# Altium PCB PCB1.PcbDoc
Units mil, origin at the board's own origin, x right, y up, seen from the top; angles counter-clockwise.
Board outline 1400 x 1300 mil, 4 copper layers (L1 (Signal), L2 (GND), L3 (GND), L4 (Signal)), stack 60.468 mil thick; 35 components, 27 nets, 172 pads, 68 vias.
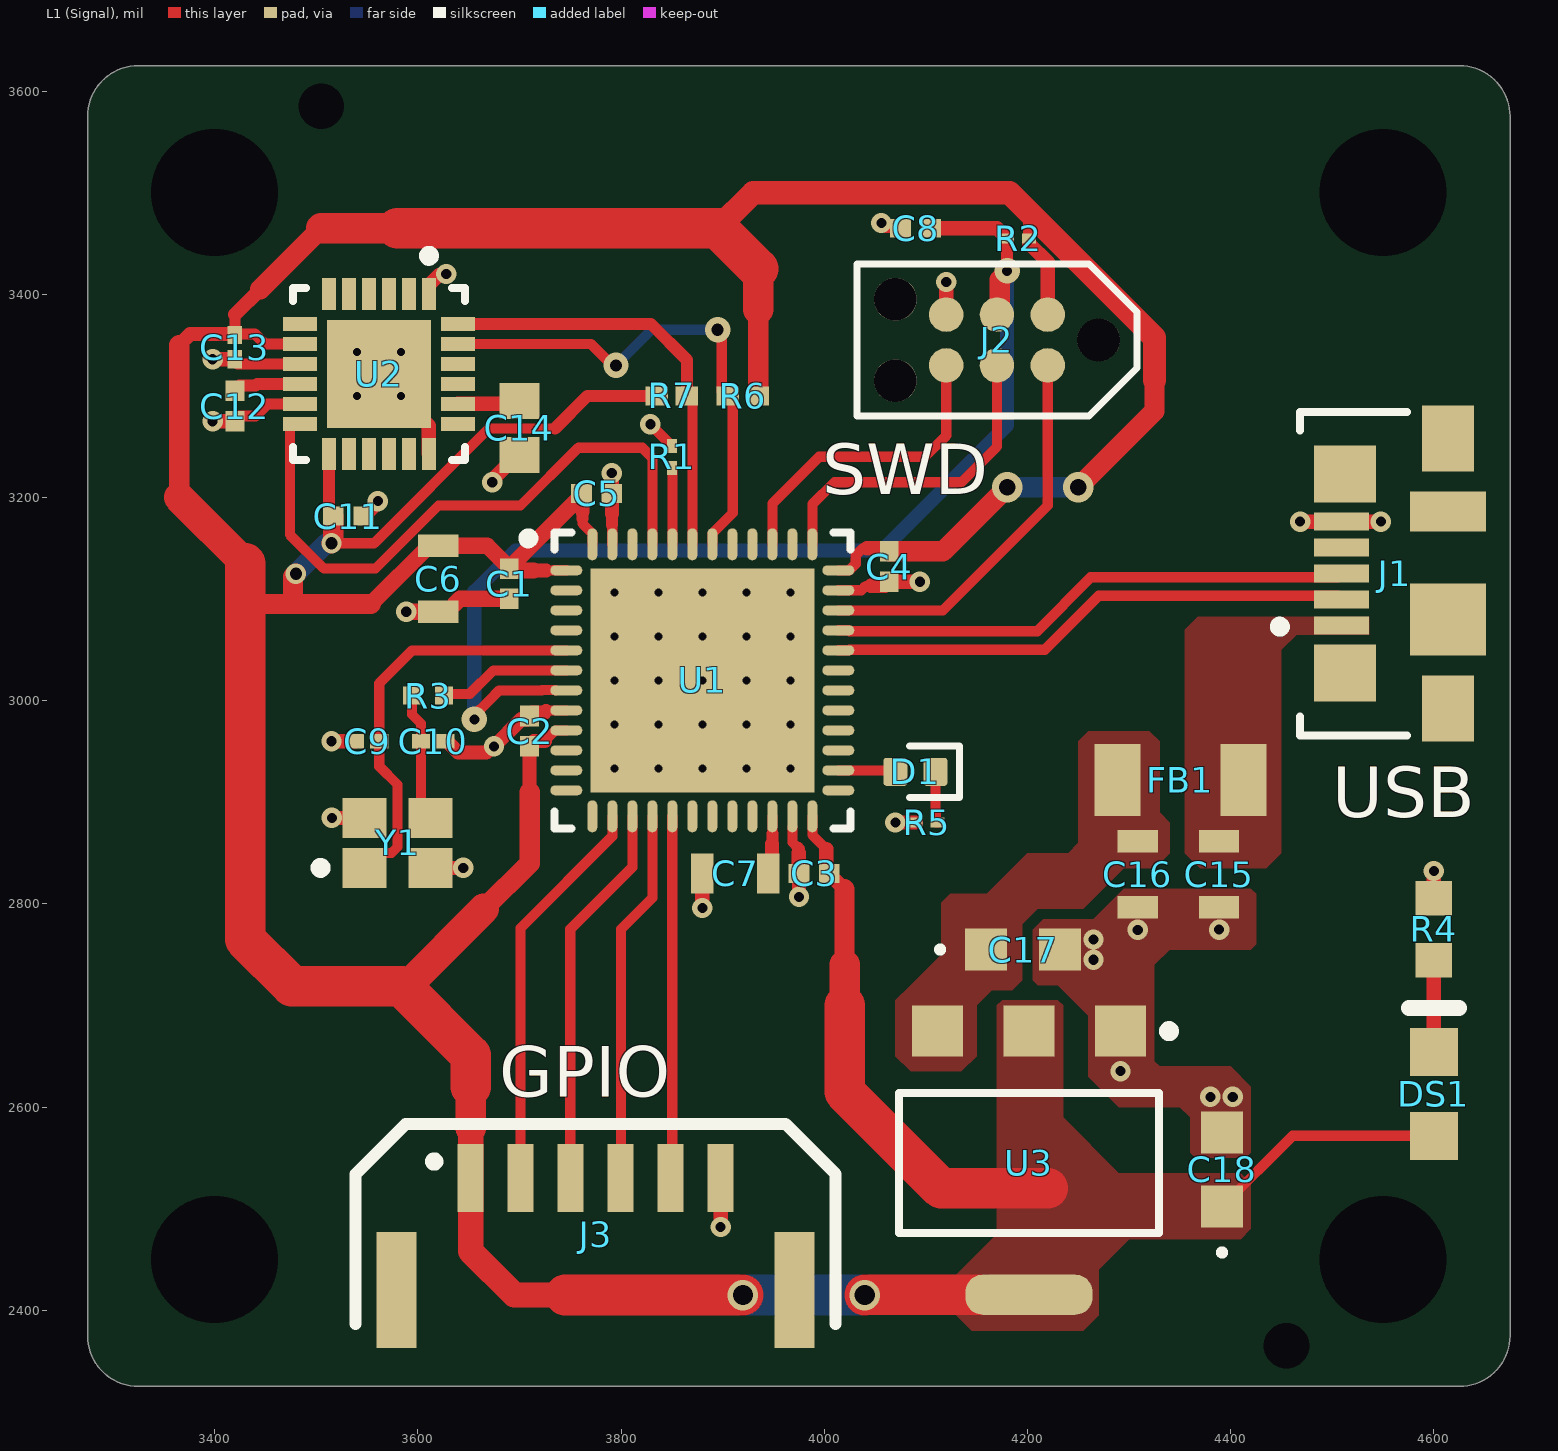
[diagram p0: L1 (Signal) view]
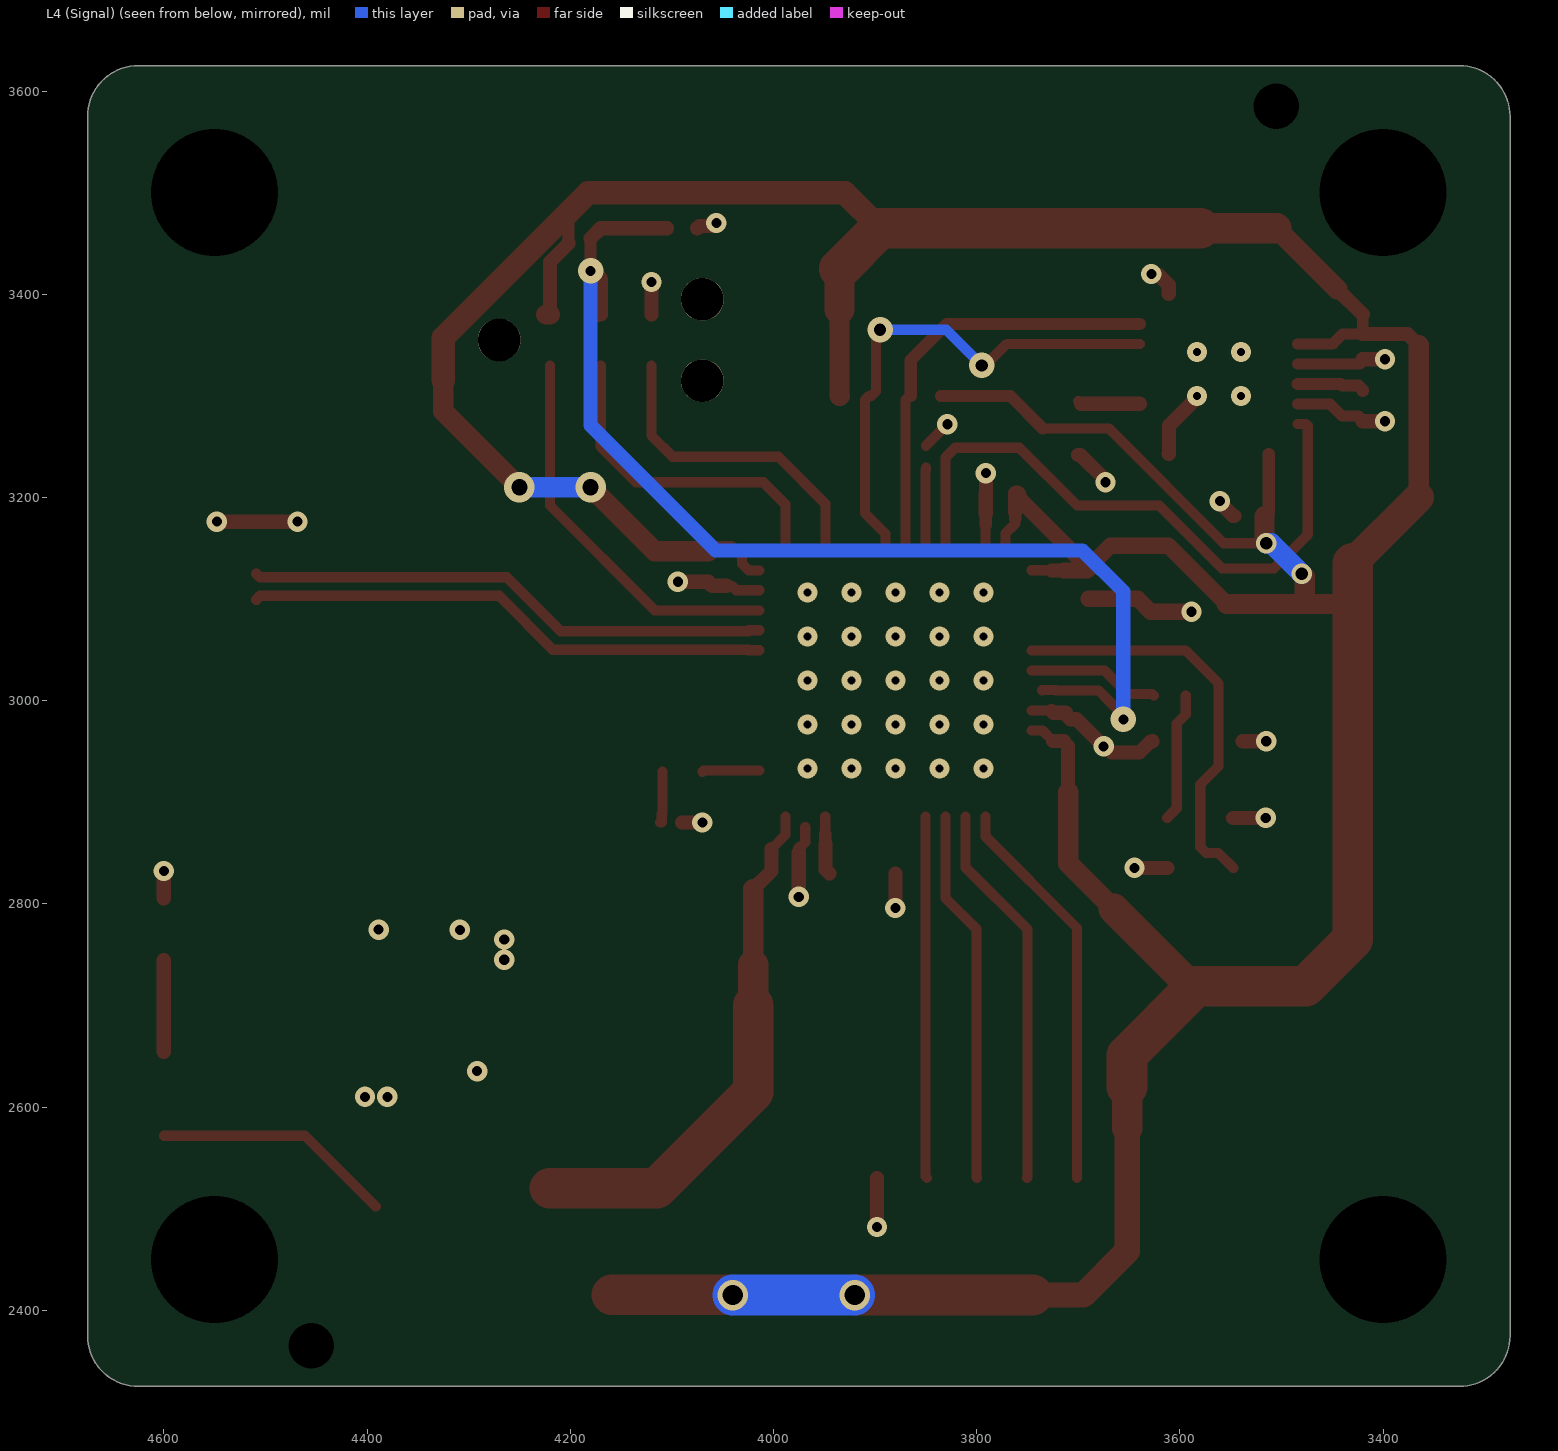
[diagram p1: L4 (Signal) view, seen from below]
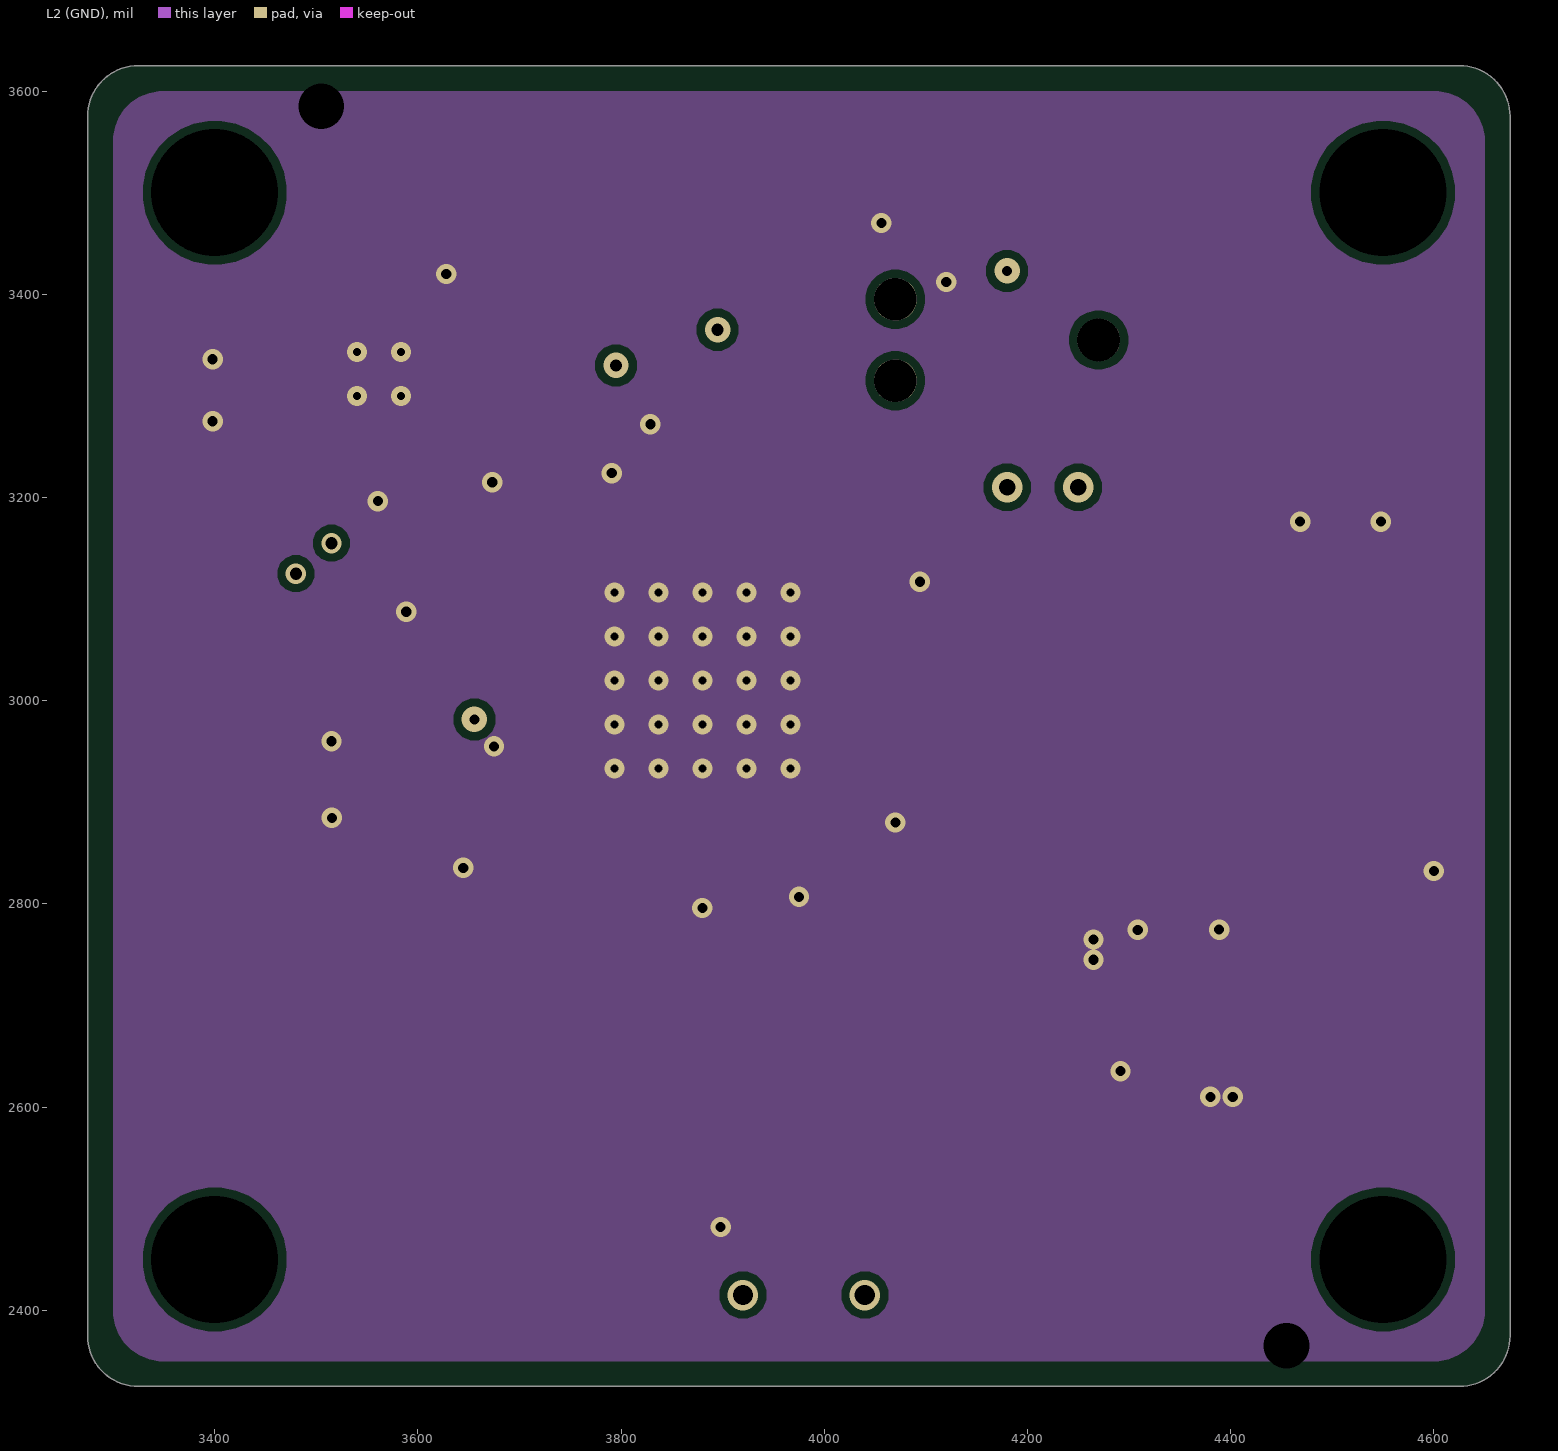
[diagram p2: L2 (GND)]
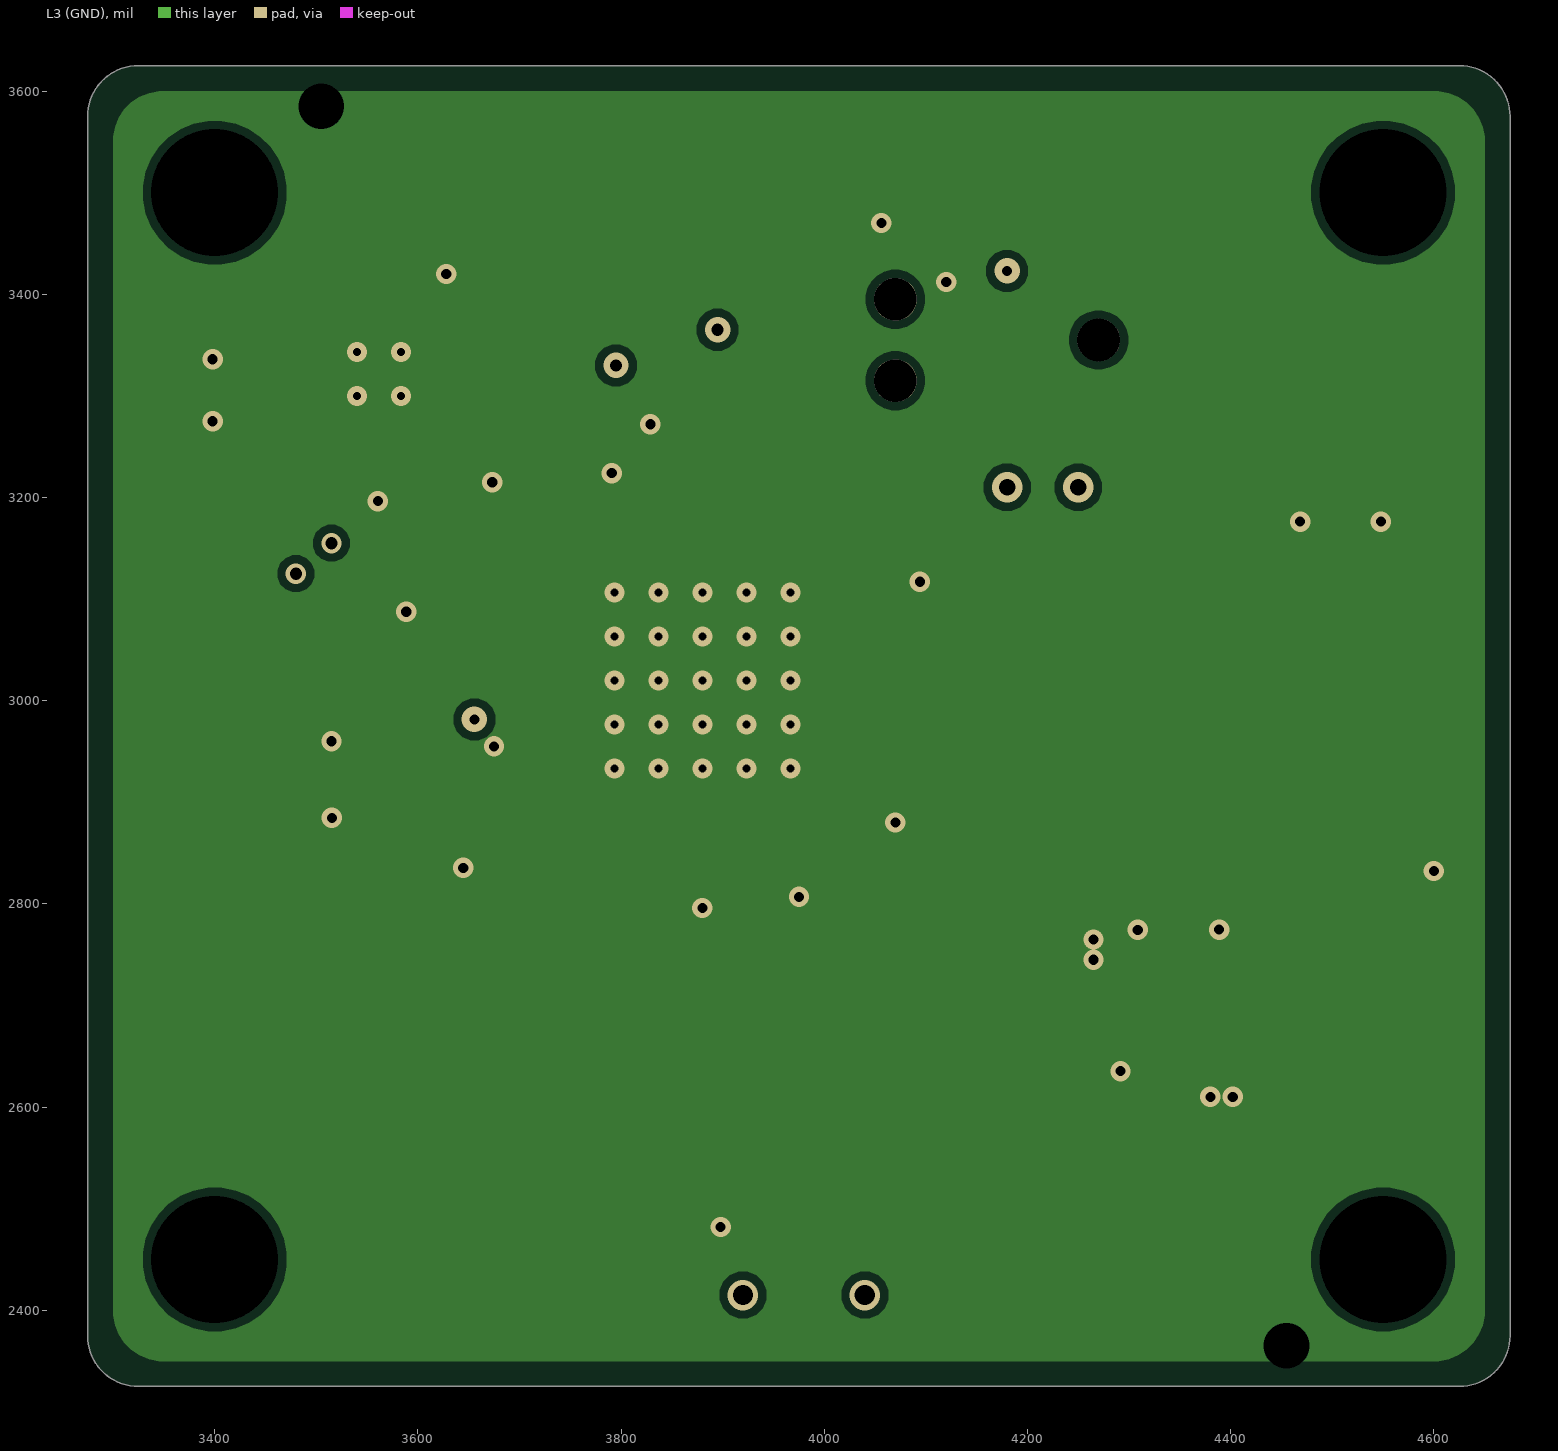
[diagram p3: L3 (GND)]
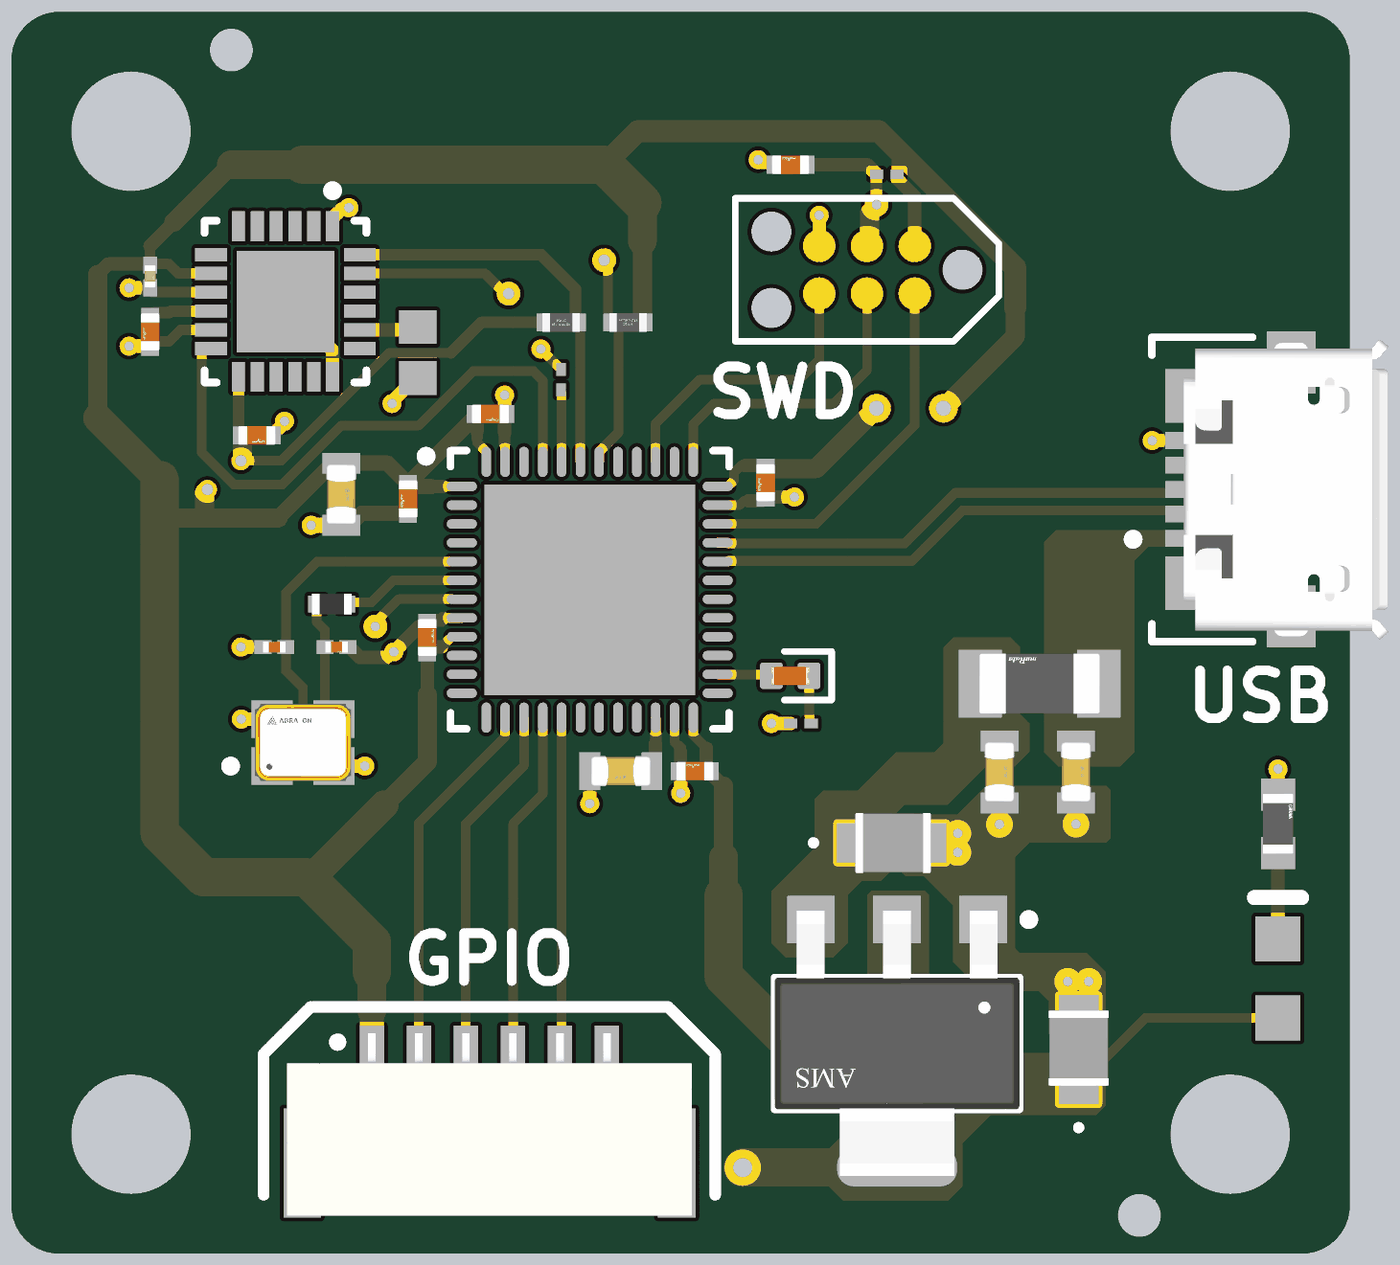
[diagram p4: 3D render of the assembled board from above, using the file's embedded part models]

## Layer stack, top to bottom
Top Solder: solder mask 1, SM-001, Dk 4
L1 (Signal): signal copper 1.378
Dielectric 1: prepreg 7.874, PP-017, Dk 4.4
L2 (GND): signal copper 0.0175
Dielectric 3: core 41.9291, Core-039, Dk 4.6
L3 (GND): signal copper 0.0175
Dielectric 5: prepreg 7.874, PP-017, Dk 4.4
L4 (Signal): signal copper 1.378
Bottom Solder: solder mask 1, SM-001, Dk 4

## Board outline
3275,2375 ccw(c3325,2375) 3325,2325 4625,2325 ccw(c4625,2375) 4675,2375 4675,3575 ccw(c4625,3575) 4625,3625 3325,3625 ccw(c3325,3575) 3275,3575

## Design rules (kind name [scope] priority, off if disabled: settings)
Clearance [All] p1: gap=8 ignorepadtopadclearanceinfootprint=FALSE except(0: SMDPad-Hole THPad-Hole Via-Hole; 1: Arc-SMDPad Track-SMDPad SMDPad-SMDPad; 2: Arc-Hole Track-Hole)
DiffPairsRouting [All] p1: maxlimit=10 minlimit=8 mostfreqgap=10 toplayer_maxgap=8 toplayer_prefgap=8 toplayer_minwidth=10.24 toplayer_maxwidth=10.24 toplayer_prefwidth=10.24 bottomlayer_maxgap=8 bottomlayer_prefgap=8 bottomlayer_minwidth=10.24 bottomlayer_maxwidth=10.24 bottomlayer_prefwidth=10.24 impedanceprofiledriven=TRUE impedanceprofileid={64983045-385C-4835-AEB7-88178D9B45DB} impedanceprofilevalue=90.000000 maxuncoupledlength=500
HoleSize [All] p1: absolutevalues=TRUE maxlimit=200 minlimit=1 maxpercent=80.000 minpercent=20.000
MinimumSolderMaskSliver [All] p1: minsoldermaskwidth=0.01
PolygonConnect [All] p1: connectstyle=Direct reliefconductorwidth=10 reliefentries=4 polygonreliefangle="90 Angle" airgapwidth=10
RoutingVias [All] p1: holewidth=12 width=25 viastyle="Through Hole" minholewidth=5 minwidth=10 maxholewidth=200 maxwidth=200
SilkToSolderMaskClearance [IsPad] p1: minsilkscreentomaskgap=0.01 clearancetoexposedcopper=TRUE
SolderMaskExpansion [All] p1: expansion=4 istentingtop=FALSE
SupplyNets "Schematic Supply Nets_3" [InNet('+3V3')] p1: voltage=0.000
SupplyNets "Schematic Supply Nets_2" [InNet('GND')] p2: voltage=0.000
SupplyNets "Schematic Supply Nets_1" [InNet('VBUS')] p3: voltage=0.000
SupplyNets "Schematic Supply Nets" [InNet('+5V')] p4: voltage=0.000
UnRoutedNet [All] p1: checkbadconnections=TRUE
Width [All] p1: maxlimit=60 minlimit=4 preferedwidth=10
25 further rules are at their usual default settings.

## Classes and differential pairs
differential pair USB_D: +USB_D_P -USB_D_N

## Components (designator, comment, footprint, x,y, rotation, side; value= is the part's Value field where it differs from the comment)
C1 "GCM155R71C104KA55D" FP-GCM155-0_05-IPC_C 3690,3115.1 r270 top
C2 "GCM155R71C104KA55D" FP-GCM155-0_05-IPC_C 3710,2970 r90 top
C3 "GCM155R71C104KA55D" FP-GCM155-0_05-IPC_C 3990,2830 r180 top
C4 "GCM155R71C104KA55D" FP-GCM155-0_05-IPC_C 4064,3132 r270 top
C5 "GCM155R71C104KA55D" FP-GCM155-0_05-IPC_C 3776,3204 r0 top
C6 "CGA3E1X7S1C225K080AE" FP-CGA3E-0_3-0_1-IPC_C 3620,3120 r270 top
C7 "CGA3E1X7S1C225K080AE" FP-CGA3E-0_3-0_1-IPC_C 3912.48,2830 r180 top
C8 "GCM155R71C104KA55D" FP-GCM155-0_05-IPC_C 4090,3465 r180 top
C9 "GJM0335C1E100GB01D" FP-GJM033-0_03-IPC_B 3550,2960 r180 top
C10 "GJM0335C1E100GB01D" FP-GJM033-0_03-IPC_B 3615,2960 r0 top
C11 "GCM155R71C104KA55D" FP-GCM155-0_05-IPC_C 3531.65,3181.65 r0 top
C12 "GCM155R71C104KA55D" FP-GCM155-0_05-IPC_C 3420,3290 r270 top
C13 "C0603X7R0J103K030BA" FP-C0603-030-0_03-IPC_B 3420,3348.06 r270 top
C14 "C0603X222K5RACTU" CAPC1608X87X35NL15T15 3700,3268.43 r270 top value=2n2
C15 "CGA3E1X7S1C225K080AE" FP-CGA3E-0_3-0_1-IPC_C 4388.62,2829.22 r270 top
C16 "CGA3E1X7S1C225K080AE" FP-CGA3E-0_3-0_1-IPC_C 4308.62,2829.22 r270 top
C17 "C2012X5R1C226M085AC" C2012_Commercial 4195.75,2755 r0 top
C18 "C2012X5R1C226M085AC" C2012_Commercial 4391.5,2538.58 r90 top
D1 "RED" LED_0402_RED 4089.68,2930 r0 top
DS1 "HSMG-C170" AVAG-HSMX-C170_V 4600,2613.08 r90 top
FB1 "BLM31PG121SN1L" FP-BLM31-0_2-t1_1-MFG 4350.63,2921.7 r180 top
J1 "473460001" FP-473460001-MFG 4600,3125 r90 top
J2 "TC2030-NL" TC2030-NL-FP 4170,3355 r180 top
J3 "SM06B-GHS-TB" SM06B-GHS-TB 3775,2475 r0 top
R1 "CRG0201F10K" RESC0603X26X15LL03T05 3850,3240 r270 top
R2 "CRG0201F10K" RESC0603X26X15LL03T05 4190.83,3455 r0 top
R3 "ERJ2GE0R00X" RESC1005X40X25LL05T05 3610,3005 r0 top
R4 "AC0603FR-071KL" FP-AC0603-IPC_B 4600,2775 r90 top
R5 "CRG0201F10K" RESC0603X26X15LL03T05 4100.83,2880 r0 top
R6 "CRGCQ0402J2K2" FP-CRGCQ0402-IPC_C 3920,3300 r180 top value=2k2
R7 "CRGCQ0402J2K2" FP-CRGCQ0402-IPC_C 3850,3300 r0 top value=2k2
U1 "STM32F411CEU6" STM-UFQFPN48_L 3880,3020 r0 top
U2 "MPU-6050" IS-QFN-24_V 3561.65,3321.65 r270 top
U3 "AMS1117-3.3" FP-AMS1117-IPC_C 4201.5,2545 r270 top
Y1 "ABM10AIG-24.000MHZ-2Z-T" FP-ABM10AIG-MFG 3580,2860 r0 top

## Footprints (in the part's own frame and the unit in brackets; to place one, negate y for a bottom-side part, rotate by r counter-clockwise, add the part's x,y. Pads: shape width x height; smd on the part's side, far side on the other; paste and mask are expansions set on the pad)
AVAG-HSMX-C170_V [mm] "SMD, 2-Leads, Body 2x1.25mm, Height 0.8mm"
  rect 1.2x1.2 smd: 1(-1.05,0) 2(1.05,0)
  silkscreen extent 2.15,-0.63 2.15,0.63, body extent -1,-0.63 1,0.63, height 0.8
C2012_Commercial [mm]
  rect 1.05x1.05 smd: 1(-0.925,0) 2(0.925,0)
  silkscreen extent -2.12,-0.05 -2.02,0.05, body extent -0.96,-0.8 1.04,0.8, height 1.25
CAPC1608X87X35NL15T15 [mm] "Chip Capacitor, 2-Leads, Body 1.60x0.80mm, IPC Medium Density"
  rect 0.9x1 smd: 1(-0.675,0) 2(0.675,0)
  body extent -0.87,-0.48 0.87,0.47, height 0.87
FP-473460001-MFG [mm]
  rect 0.45x1.38 smd paste+0 mask+0: 1(-1.3,2.31) 2(-0.65,2.31) 3(0,2.31) 4(0.65,2.31) 5(1.3,2.31)
  rect 1.425x1.55 smd paste+0 mask+0: 6(-2.488,2.225) 7(2.488,2.225)
  rect 1.65x1.3 smd paste+0 mask+0: 8(-3.375,-0.35) 11(3.375,-0.35)
  rect 1.8x1.9 smd paste+0 mask+0: 9(-1.15,-0.35)
  rect 1x1.9 smd paste+0 mask+0: 10(1.55,-0.35)
  silkscreen extent -4.05,0.67 4.05,3.97, body extent -4.3,-2.48 4.3,3.45, height 0.25
FP-ABM10AIG-MFG [mm]
  rect 1.1x1 smd paste+0 mask+0: 1(-0.825,-0.625) 2(0.825,-0.625) 3(0.825,0.625) 4(-0.825,0.625)
  silkscreen extent -2.05,-0.75 -1.8,-0.5, body extent -1.48,-1.22 1.48,1.22, height 0.25
FP-AC0603-IPC_B [mil]
  rect 33.81x35.91 smd paste+0 mask+0: 1(-30.58,0) 2(30.58,0)
  body extent -57,-28 57,28, height 10
FP-AMS1117-IPC_C [mm]
  rect 1.27x1.27 smd paste+0 mask+0: 1(-3.295,2.29) 2(-3.295,0) 3(-3.295,-2.29)
  rrect87% 1.004x3.182 smd paste+0 mask+0: 4(3.295,0)
  silkscreen extent -3.42,-3.25 1.75,3.63, body extent -3.9,-3.35 3.9,3.35, height 0.25
FP-BLM31-0_2-t1_1-MFG [mm]
  rect 1.15x1.8 smd paste+0 mask+0: 1(-1.575,0) 2(1.575,0)
  body extent -2.25,-1 2.25,1, height 0.25
FP-C0603-030-0_03-IPC_B [mil]
  rect 17.97x14.28 smd paste+0 mask+0: 1(-11.94,0) 2(11.94,0)
  body extent -27,-13 27,13, height 10
FP-CGA3E-0_3-0_1-IPC_C [mm]
  rect 0.556x1.006 smd paste+0 mask+0: 1(-0.825,0) 2(0.825,0)
  body extent -1.2,-0.65 1.2,0.65, height 0.25
FP-CRGCQ0402-IPC_C [mil]
  rect 22.03x18.6 smd paste+0 mask+0: 1(-14.81,0) 2(14.81,0)
  body extent -30,-15 30,15, height 10
FP-GCM155-0_05-IPC_C [mil]
  rect 20.29x18.6 smd paste+0 mask+0: 1(-14.9,0) 2(14.9,0)
  body extent -29,-15 29,15, height 10
FP-GJM033-0_03-IPC_B [mil]
  rect 17.88x14.28 smd paste+0 mask+0: 1(-11.98,0) 2(11.98,0)
  body extent -27,-13 27,13, height 10
IS-QFN-24_V [mm] "QFN, 24-Leads, Body 4x4mm, Pitch 0.5mm, Thermal Pad 2.7x2.6mm"
  rect 0.8x0.35 smd: 1(-2,1.25) 2(-2,0.75) 3(-2,0.25) 4(-2,-0.25) 5(-2,-0.75) 6(-2,-1.25) 13(2,-1.25) 14(2,-0.75) 15(2,-0.25) 16(2,0.25) 17(2,0.75) 18(2,1.25)
  rect 0.35x0.85 smd mask+0.102: 7(-1.25,-1.975) 8(-0.75,-1.975) 9(-0.25,-1.975) 10(0.25,-1.975) 11(0.75,-1.975) 12(1.25,-1.975) 19(1.25,1.975) 20(0.75,1.975) 21(0.25,1.975) 22(-0.25,1.975) 23(-0.75,1.975) 24(-1.25,1.975)
  rect 2.7x2.6 smd: 25(0,0)
  silkscreen extent -3.07,-2.15 2.15,2.15, body extent -2,-2 2,2, height 0.95
LED_0402_RED [mm]
  rrect25% 0.6x0.7 smd: A(-0.5,0) K(0.5,0)
  silkscreen extent -0.15,-0.65 1.1,0.65, body extent -0.51,-0.25 0.51,0.25, height 0.45
RESC0603X26X15LL03T05 [mm] "Chip Resistor, 2-Leads, Body 0.60x0.30mm, IPC High Density"
  rect 0.35x0.25 smd: 1(-0.275,0) 2(0.275,0)
  body extent -0.32,-0.16 0.31,0.17, height 0.26
RESC1005X40X25LL05T05 [mm] "Chip Resistor, 2-Leads, Body 1.05x0.55mm, IPC High Density"
  rect 0.45x0.45 smd: 1(-0.4,0) 2(0.4,0)
  body extent -0.53,-0.28 0.53,0.28, height 0.4
SM06B-GHS-TB [mm]
  rect 0.65x1.7 smd: 1(-3.125,1.4) 2(-1.875,1.4) 3(-0.625,1.4) 4(0.625,1.4) 5(1.875,1.4) 6(3.125,1.4)
  rect 1x2.9 smd: ""(-4.975,-1.4) ""(4.975,-1.4)
  silkscreen extent -6,-2.25 6,2.75, body extent -5.38,-2.8 5.38,2.05, height 4.26
STM-UFQFPN48_L [mm] "QFN, 48-Leads, Body 7.1x7.1mm, Pitch 0.5mm, Thermal Pad 5.6x5.6mm, IPC High Density"
  oval 0.8x0.25 smd: 1(-3.4,2.75) 2(-3.4,2.25) 3(-3.4,1.75) 4(-3.4,1.25) 5(-3.4,0.75) 6(-3.4,0.25) 7(-3.4,-0.25) 8(-3.4,-0.75) 9(-3.4,-1.25) 10(-3.4,-1.75) 11(-3.4,-2.25) 12(-3.4,-2.75) 25(3.4,-2.75) 26(3.4,-2.25) 27(3.4,-1.75) 28(3.4,-1.25) 29(3.4,-0.75) 30(3.4,-0.25) 31(3.4,0.25) 32(3.4,0.75) 33(3.4,1.25) 34(3.4,1.75) 35(3.4,2.25) 36(3.4,2.75)
  oval 0.25x0.8 smd: 13(-2.75,-3.4) 14(-2.25,-3.4) 15(-1.75,-3.4) 16(-1.25,-3.4) 17(-0.75,-3.4) 18(-0.25,-3.4) 19(0.25,-3.4) 20(0.75,-3.4) 21(1.25,-3.4) 22(1.75,-3.4) 23(2.25,-3.4) 24(2.75,-3.4) 37(2.75,3.4) 38(2.25,3.4) 39(1.75,3.4) 40(1.25,3.4) 41(0.75,3.4) 42(0.25,3.4) 43(-0.25,3.4) 44(-0.75,3.4) 45(-1.25,3.4) 46(-1.75,3.4) 47(-2.25,3.4) 48(-2.75,3.4)
  rect 5.6x5.6 smd: 49(0,0)
  silkscreen extent -4.47,-3.7 3.7,3.7, body extent -3.55,-3.55 3.55,3.55, height 0.6
TC2030-NL-FP [mil]
  round 33.98 smd paste-16.99: 1(-50,-25) 2(-50,25) 3(0,-25) 4(0,25) 5(50,-25) 6(50,25)
  round 42.01 hole 42.01 unplated: MH(-100,0) MH(100,-40) MH(100,40)
  silkscreen extent -138,-75 138,75

## Part data
C1 C2 C3 C4: library part CMP-2008-03711-3, "Ceramic Capacitor for Automotive 100nF ±10% 16VDC X7R 0402 Paper T/R", Capacitance=100nF, Case Code (Imperial)=0402, Case Code (Metric)=1005, Dielectric=X7R, Max Operating Temperature=125°C, Min Operating Temperature=-55°C, Package Quantity=1, Ratings=AEC-Q200, Tolerance=10%, Voltage=16V, Case/Package=0402, Depth=0.5mm, Height=0.5mm, Lead Free="Lead Free", Length=1mm, Mount="Surface Mount", Packaging="Tape and Reel", Radiation Hardening=No, REACH SVHC="No SVHC", Termination=SMD/SMT, Thickness=0.022inch, Voltage Rating=16V, Voltage Rating (DC)=16V, Width=0.02inch
C5 C8 C11 C12: library part CMP-2008-03711-3, "Ceramic Capacitor for Automotive 100nF ±10% 16VDC X7R 0402 Paper T/R", Capacitance=100n, Case Code (Imperial)=0402, Case Code (Metric)=1005, Dielectric=X7R, Max Operating Temperature=125°C, Min Operating Temperature=-55°C, Package Quantity=1, Ratings=AEC-Q200, Tolerance=10%, Voltage=16V, Case/Package=0402, Depth=0.5mm, Height=0.5mm, Lead Free="Lead Free", Length=1mm, Mount="Surface Mount", Packaging="Tape and Reel", Radiation Hardening=No, REACH SVHC="No SVHC", Termination=SMD/SMT, Thickness=0.022inch, Voltage Rating=16V, Voltage Rating (DC)=16V, Width=0.02inch
C6 C7: library part CMP-08246-001138-1, "Cap Ceramic 2.2uF 16V X7S 10% Pad SMD 0603 +125°C Automotive T/R", Capacitance=2u2, Case Code (Imperial)=0603, Case Code (Metric)=1608, Max Operating Temperature=125°C, Min Operating Temperature=-55°C, Ratings=AEC-Q200, Tolerance=10%, Voltage Rating=16V, Case/Package=0603, Features="Soft Termination", Length=0.063inch, Mount="Surface Mount", Packaging="Tape and Reel", Thickness=0.037inch, Width=0.031inch
C9 C10: library part CMP-06035-012709-1, "Ceramic Capacitor 10pF ±2% 25V C0G 0201 (0603 Metric)", Capacitance=10p, Case Code (Imperial)=0201, Case Code (Metric)=0603, Dielectric=C0G, Max Operating Temperature=125°C, Min Operating Temperature=-55°C, Package Quantity=15000, Resistor Type=Ceramic, Tolerance=2%, Voltage Rating (DC)=25V, Case/Package=0201, Height=0.3mm, Length=0.6mm, Mount="Surface Mount", Packaging="Tape and Reel", Termination=SMD/SMT, Thickness=300um, Weight=1.2E-05oz, Width=0.3mm
C13: library part CMP-08246-006272-1, "Multilayer Ceramic Capacitors 10nF ±10% 6.3V X7R SMD 0201", Capacitance=10n, Case Code (Imperial)=0201, Case Code (Metric)=0603, Dielectric=X7R, Dielectric Material=Ceramic, Max Operating Temperature=125°C, Min Operating Temperature=-55°C, Package Quantity=1, Tolerance=10%, Voltage Rating=6.3V, Case/Package=0201, Construction=Flat, Depth=0.3mm, Height=0.3mm, Lead Free="Lead Free", Length=0.6mm, Mount="Surface Mount", Number of Pins=2, Packaging="Tape and Reel", Radiation Hardening=No, Resistor Type=Ceramic, RoHS Compliant=Yes, Series=C, Termination=Wraparound, Thickness=0.013inch, Voltage Rating (DC)=6.3V, Weight=6E-06oz, Width=0.012inch
C14: library part CMP-2006-03302-1, Manufacturer=Kemet, Part Number=C0603X222K5RACTU
C15 C16: library part CMP-08246-001138-1, "Cap Ceramic 2.2uF 16V X7S 10% Pad SMD 0603 +125°C Automotive T/R", Capacitance=2u2F, Case Code (Imperial)=0603, Case Code (Metric)=1608, Max Operating Temperature=125°C, Min Operating Temperature=-55°C, Ratings=AEC-Q200, Tolerance=10%, Voltage Rating=16V, Case/Package=0603, Features="Soft Termination", Length=0.063inch, Mount="Surface Mount", Packaging="Tape and Reel", Thickness=0.037inch, Width=0.031inch
C17 C18: "Capacitor", Capacitance=22uF, Manufacturer_Name=TDK, Mouser Part Number=810-C2012X5R1C226MAC, Arrow Part Number=C2012X5R1C226M085AC, Arrow Price/Stock=https://www.arrow.com/en/products/c2012x5r1c226m085ac/tdk, Datasheet Link=https://product.tdk.com/system/files/dam/doc/product/capacitor/ceramic/mlcc/catalog/mlcc_commercial_general_en.pdf, Height=0.75mm, Manufacturer_Part_Number=C2012X5R1C226M085AC, Mouser Price/Stock=https://www.mouser.co.uk/ProductDetail/TDK/C2012X5R1C226M085AC?qs=6JAMGB%252BEdkx95FUmvIwfyQ%3D%3D
D1: library part LED_0402_RED, "LED 0402 RED SMD"
DS1: library part CMP-2000-05062-1, "Chip LED, Green, 2.2 V, -40 to 85 degC, 2-Pin SMD, Pb-Free, Tape and Reel", Forward Current If=20mA, Forward Voltage=2.2V, Forward Voltage VF Max=2.6V, LED Colour=Green, Manufacturer=Avago, Operating Temperature Max=85degC, Operating Temperature Min=-30degC, Operating Temperature Range=-30degCto+85degC, Opto Case Style=SMD, Package Description="2-Pin Surface Mount Device, Body 2 x 1.25 mm, Height 0.8 mm", Package Reference=HSMX-C170, Storage Temperature Min=-40degC, Bulb Size=1.25mmx1.4mm, Datasheet URL=https://datasheet.ciiva.com/29280/180495-da-01-en-chip-led-hsmg-c170-gelb-gruen-29280971.pdf, Datasheet Version=Oct-08, Dominant Wavelength=572nm, Dominant Wavelength Typ=572nm, External Depth=0.8mm, External Length / Height=2mm, External Width=1.25mm, Forward Current If Max=20mA, LED Mounting=SMD, LED Type=Standard, Lens Shape=Rectangular, Light Area Height=1mm, Luminous Intensity=15mcd, Luminous Intensity Min=4mcd, Luminous Intensity Typ=15mcd, Manufacturer URL=http://www.avagotech.com/, Mounting Type=SMD, MSL=MSL2A-4weeks, No. of Pins=2, Opto Mounting Orientation=Top, Packaging=CutTape, Peak Forward Current=20mA, Peak Wavelength=570nm, PIV Max=5V, Storage Temperature Max=85degC, SVHC=NoSVHC(16-Jun-2014), Viewing Angle=170deg, Voltage Vf Typ=2.2V, Wavelength Typ=570nm
FB1: library part CMP-0686-00732-3, "Chip Ferrite Bead Array, 1206, 120Ω @ 100MHz, 0.02Ω, 25%, 3.5A", Case Code (Imperial)=1206, Case Code (Metric)=3216, Current Rating=3.5A, DC Current=3A, DC Resistance (DCR)=20mR, Frequency=100MHz, Max Operating Temperature=125°C, Min Operating Temperature=-55°C, Package Quantity=3000, Tolerance=25%, Case/Package=1206, Contact Plating=Tin, Core Material=Ferrite, Depth=1.6mm, Height=1.1mm, Impedance=120R, Lead Free="Lead Free", Length=3.2mm, Material=Steel, Max Current Rating=3.5A, Max DC Current=3A, Military Standard=Not, Number of Lines=1, Number of Pins=2, Packaging="Tape and Reel", Radiation Hardening=No, RoHS Compliant=Yes, Shielding=Unshielded, Termination=SMD/SMT, Test Frequency=100MHz, Width=1.6mm
J1: library part CMP-2000-05246-2, "CONN RCPT USB2.0 MICRO B SMD R/A", Current Rating=1.8A, Manufacturer=Molex, Package=0, Temperature="-30°C to +85°C", Temperature Range High=+85°C, Temperature Range Low=-30°C, Voltage Rating=30V, Automotive=No, Category=Conn, ComponentLink2Description=Datasheet, ComponentLink2URL=https://www.molex.com/webdocs/datasheets/pdf/en-us/0473460001_IO_CONNECTORS.pdf, Conn Orientation="Right Angle", Contact Material=Gold,Nickel, Device Class L1=Connectors, Device Class L2="USB Connectors", Device Class L3=unset, Digikey Description="CONN RCPT USB2.0 MICRO B SMD R/A", Footprint Url=https://www.molex.com/pdm_docs/sd/473460001_sd.pdf, Height=2.945mm, Is Female=yes, Lead Free=Yes, Manufacturer Part Number=473460001, Number Of Contacts=5, Octopart=https://octopart.com/47346-0001-molex-7164928, Pitch=0.65mm, RoHS=TRUE, Shielding=true, Usb Standard="USB 2.0"
J2: "Tag-Connect No-Solder SWD Debug Connector (No Legs) DO NOT PLACE", Manufacturer=Tag-Connect, Manufacturer Part Number=TC2030-NL-FP
J3: "Header Connector 6 Position 1.25MM Pitch SMD Horizontal JST GH", Manufacturer=JST, Manufacturer Part Number=SM06B-GHS-TB
R1 R2: library part CMP-2004-03568-1, Manufacturer="TE Connectivity / AMP", Resistance=10k, Part Number=CRG0201F10K
R3: library part CMP-2000-07451-1, "Chip Resistor, 0 Ohm, 0.1 W, -55 to 155 degC, 0402 (1005 Metric), RoHS, Tape and Reel", Case Code (Imperial)=0402, Case Code (Metric)=1005, Manufacturer=Panasonic, Max Operating Temperature=155degC, Max Power Dissipation=100mW, Min Operating Temperature=-55degC, Package Description="2-Pin Surface Mount Device, Body 1 x 0.5 mm", Package Quantity=1, Package Reference=402, Resistance=0R, Temperature Coefficient=600ppm/��C, Tolerance=5%, Voltage Rating=50V, Case/Package=0402, Composition=ThickFilm, Contact Plating=Tin, Datasheet URL=https://industrial.panasonic.com/cdbs/www-data/pdf/RDA0000/AOA0000C301.pdf, Datasheet Version=03/2015, Depth=0.5mm, Height=0.35mm, Lead Free=LeadFree, Length=1mm, Manufacturer URL=http://www.panasonic.com/, Military Standard=Not, Mount=SurfaceMount, Mounting Technology=SurfaceMount, Number of Terminations=2, Packaging=TapeandReel, Power Rating=100mW, Radiation Hardening=No, REACH SVHC=NoSVHC, RoHSCompliant=True, Termination=SMD/SMT, Voltage Rating (DC)=50V, Width=0.02inch
R4: library part CMP-2000-04828-3, "RES 1kΩ 1.00% 0.1W 0603", Case Code (Imperial)=0603, Case Code (Metric)=1608, Max Operating Temperature=155°C, Max Power Dissipation=100mW, Min Operating Temperature=-55°C, Package Quantity=1, Ratings=AEC-Q200, Resistance=1kR, Resistor Type="Thick Film", Temperature Coefficient=100ppm/°C, Tolerance=1%, Voltage Rating=50V, Case/Package=0603, Construction=Rectangular, Depth=0.8mm, Features="Moisture Resistant", Height=0.022inch, Lead Free="Lead Free", Length=0.063inch, Military Standard=Not, Number of Terminations=2, Packaging="Tape and Reel", Power Rating=100mW, RoHS Compliant=Yes, Series=AC, Size Code=0603, Termination=SMD/SMT, Width=0.031inch
R5: library part CMP-2004-03568-1, Manufacturer="TE Connectivity / AMP", Resistance=1k, Part Number=CRG0201F10K
R6 R7: library part CMP-03211-006553-1, "CRGCQ0402 2.2KΩ 5% ±100ppm/°C 50V", Ambient Temperature Range High=+70°C, Manufacturer="TE Connectivity", Package=CRGCQ0402, Power Rating=0.0625W, Resistance=2.2KΩ, Temperature="-55°C to +155°C", Temperature Coefficient=±100ppm/°C, Temperature Range High=+155°C, Temperature Range Low=-55°C, Tolerance=0.05, Voltage Rating=50V, Automotive=Yes, Category=Res, ComponentLink2Description=Datasheet, ComponentLink2URL=https://www.te.com/commerce/DocumentDelivery/DDEController?Action=showdoc&DocId=Data+Sheet%7F1773204-3%7F1%7Fpdf%7FEnglish%7FENG_DS_1773204-3_1.pdf%7F4-2176347-767, Composition="Thick Film", Device Class L1="Passive Components", Device Class L2=Resistors, Device Class L3="Chip SMD Resistors", Height=0.4mm, Ipc Land Pattern Name=RESC10050X35, Lead Free=Yes, Manufacturer Part Number=CRGCQ0402J2K2, Octopart=https://octopart.com/crgcq0402j2k2-te+connectivity-91018010, RoHS=TRUE, Series=CRGCQ
U1: library part CMP-0243-00165-1, "ARM Cortex-M4 32-bit MCU+FPU, 512 KB Flash, 128 KB RAM, 36 I/Os, 48-Pin UFQFPN, -40 to 85 degC, Tray", I/Os (High Current)=36, Operating Frequency(F) (Processor speed) (MHz)=100, Package Description=UFQFPN48, Package Reference="48-Pin Ultra Thin Fine Pitch Quad Flat No-Lead, 7 x 7 x 0.6 mm Body, 0.5 mm Pitch, Exposed Pad", Supply Voltage(Vcc) min (V)=1.7, ComponentLink1Description="Manufacturer URL", ComponentLink1URL=http://www.st.com/, ComponentLink2Description=Datasheet, ComponentLink2URL=http://www.st.com/st-web-ui/static/active/en/resource/technical/document/datasheet/DM00115249.pdf, Core="ARM Cortex-M4", DatasheetVersion="Rev. 6", FLASH Size (Prog) (kB)=512, Internal RAM Size (kB)=128, Mounting Technology="Surface Mount", Packing=Tray
U2: library part CMP-1753-00002-2, "3-Axis Gyroscope, Accelerometer and a Digital Motion Processor(TM) (DMP), 2.375 to 3.46 V, -40 to 85 degC, 24-Pin QFN, RoHS, Tape and Reel", Manufacturer=InvenSense, Standard Package=5,000, Category=Sensors,Transducers, Datasheet URL=http://datasheet.octopart.com/MPU-6050-InvenSense-datasheet-14421344.pdf, Datasheet Version="Rev. 3.3, 05/2012", Dynamic Catalog=MPU-6000™Series, Family=Multifunction, Featured Product=MPU-60506-Axis,IntegratedI²CSolution, Manufacturer URL=http://www.invensense.com/, Online Catalog=MPU-6000™Series, Other Names="1428-1007-2 / MPU6050", Output Type=Digital, Sensor Type=MotionTracking, Unit PriceUSD=Digital
U3: library part CMP-209535-000001-1, "LDO Voltage Regulators 1A, 3.3V", Dropout Voltage=1.1V, Manufacturer="Advanced Monolithic Systems", Max Junction Temp=+125°C, Max Power Dissipation=1.2W, Max Supply Voltage=15V, Nominal Supply Current=5mA, Output Current=1A, Output Voltage=3.3V, Package=AMS1117, Temperature="-40°C to +125°C", Temperature Range Low=-40°C, Automotive=No, Category=IC, ComponentLink2Description=Datasheet, ComponentLink2URL=http://www.advanced-monolithic.com/pdf/ds1117.pdf, Device Class L1="Integrated Circuits (ICs)", Device Class L2="Power Management ICs", Device Class L3="Voltage Regulators - Linear", Height=1.8mm, Ipc Land Pattern Name=SOT229P700X180-4, Lead Free=Yes, Manufacturer Part Number=AMS1117-3.3, Number Of Outputs=1, Octopart=https://octopart.com/ams1117-3.3-advanced+monolithic+systems-25899300, Output Type=Fixed, RoHS=TRUE, Standoff Height=0.64mm, Temperature Range High=+125°C
Y1: library part CMP-27762-005365-1, "Crystal 24MHz ±20ppm 10pF SMD-4 2.5mm x 2mm Automotive"

## Free pads (board coordinates)
  round 0 hole 125 unplated: MH(3400,2450) MH(3400,3500) MH(4550,2450) MH(4550,3500)
  round 0 hole 45 unplated: TH(3505,3585) TH(4455,2365)

## Via types
v1: diameter 20, hole 10, L1 (Signal) to L4 (Signal), 29 vias
v2: diameter 19.68, hole 7.87, L1 (Signal) to L4 (Signal), 29 vias
v3: diameter 30, hole 16, L1 (Signal) to L4 (Signal), 2 vias
v4: diameter 25, hole 10, L1 (Signal) to L4 (Signal), 2 vias
v5: diameter 20, hole 12, L1 (Signal) to L4 (Signal), 2 vias
v6: diameter 25, hole 12, L1 (Signal) to L4 (Signal), 2 vias
v7: diameter 30, hole 20, L1 (Signal) to L4 (Signal), 2 vias

## Nets (pads, with @x,y where several pads share a name; then routed paths per layer and width w, separated by ;. In a path a pad name is that pad's centre, name@x,y a point inside that pad or via, vN(x,y) a via of type N, cw(c..) or ccw(c..) an arc to the next point about the centre after c; other vN are vias at no path point)
+3V3: C1.1 C2.1 C3.1 C4.1 C5.1 C6.1 C11.1 C13.1 C18.1 DS1.1 J2.1 J3.1 R2.2 R6.1 R7.1 U1.1 U1.9 U1.24 U1.36 U1.48 U2.8 U2.13 U3.2 U3.4 | length 5666.6
  L1 (Signal) w8: U1.1@3745.87,3128 3746.06,3128.19 U1.1
  L1 (Signal) w10: v5(3515,3155) 3557,3155 3670,3268 3735,3268 ; 3724.93,2960.24 3735.47,2970.79 U1.9 ; 3726,3128 3726.19,3128.19 U1.1@3746.06,3128.19 ; U1.1@3733.65,3128.35 U1.1 U1.1 ; 3762,3179 3762,3174.26 3771.73,3164.53 U1.48 U1.48@3771.81,3153.94 ; U1.24 3988.27,2867.73 4002,2854 ; U1.36 4024.53,3128.27 4031,3134.74 4031,3143 4038,3150 4042,3150 ; C18.1 4461.07,2571.74 DS1.1
  L1 (Signal) w11: 3420,3380 3420,3360.86 C13.1 3421,3361 3439.75,3361 3449.57,3351.18 U2.8
  L1 (Signal) w12: U2.13 3512.44,3185.96 3512.6,3185.8 3512.6,3184.95 3515.91,3181.65 C11.1 ; 3735,3268 3767,3300 R7.1 ; 3762,3179 3762,3186 ; R2.2 4201.65,3480.04 4201.95,3480.33
  L1 (Signal) w14: 3365,3350 3376,3361 3419.86,3361 C13.1@3420,3360.86 ; 3420,3380 3445,3405 ; 3710,2910 C2.1 ; 3714,3128 3726,3128 ; C2.1@3714.3,2960.24 3724.93,2960.24 ; C5.1 3762,3203.1 3762,3186 ; 4002,2854 4002,2832.3 4020,2814.3 ; 4042,3150 4061.7,3150 4064,3147.7 C4.1 ; R2.2@4202,3450.43 4201.65,3450.08 4220,3431.73 J2.1
  L1 (Signal) w16: 3553.77,3095.11 3611.14,3152.48 C6.1 3668.36,3152.48 C1.1@3690,3130.84 ; C1.1@3690,3129.3 3691.3,3128 3714,3128 ; C1.1 C1.1@3690,3130.84 ; C5.1@3760,3202.9 C5.1 3760.25,3204 3758.95,3202.7 3758.95,3199.8 C1.1@3690,3130.84
  L1 (Signal) w20: 3365,3200 3365,3350 ; 3430,3095.11 3477.04,3095.11 ; 3445,3405 3505,3465 ; v5(3479.97,3124.97) 3477.04,3122.04 3477.04,3095.11 ; v5(3515,3155) 3516.6,3156.6 3516.6,3181.51 C11.1 ; 3553.77,3095.11 3477.04,3095.11 ; 3665,2795 3710,2840 3710,2910 ; R6.1 3935,3300.19 3935,3385 ; 4020,2740 4020,2814.3 ; C4.1 4116.9,3146.9 v3(4180,3210) ; J2.1 J2.1@4223.78,3380 ; v3(4250,3210) 4325,3285 4325,3315.28
  L1 (Signal) w23: 3895,3465 3930,3500 4182.28,3500 4201.95,3480.33 4325,3357.28 4325,3315.28
  L1 (Signal) w25: 3651.97,2579.33 J3.1 3651.97,2458.03 3694.95,2415.05 3744.95,2415.05 3745,2415
  L1 (Signal) w30: 3365,3200 3430,3135 ; 3505,3465 3580,3465 ; 3584,2719 3589,2719 3665,2795 ; 3651.97,2579.33 3651.97,2619.97 ; 3935,3385 3935,3425 ; 4020,2700 4020,2740
  L1 (Signal) w40: 3430,3135 3430,3095.11 3430,2765 3476,2719 3584,2719 3652,2651 3652,2620 ; 3580,3465 3895,3465 3935,3425 ; 3745,2415 v7(3920,2415) ; 4020,2700 4020,2615 4115,2520 4220,2520 ; v7(4040,2415) 4040.28,2415.28 U3.4@4158.86,2415.28
  L4 (Signal) w20: v5(3479.97,3124.97) 3510,3155 v5(3515,3155) ; v3(4180,3210) v3(4250,3210)
  L4 (Signal) w40: v7(3920,2415) v7(4040,2415)
+5V: C16.1 C17.1 FB1.2 U3.3
GND: C1.2 C2.2 C3.2 C4.2 C5.2 C6.2 C7.2 C8.2 C9.2 C10.2 C11.2 C12.2 C13.2 C14.2 C15.2 C16.2 C17.2 C18.2 J1.5 J2.5 J3.6 pad.TH R1.1 R4.2 R5.1 U1.8 U1.23 U1.35 U1.47 U1.49 U2.1 U2.9 U2.11 U2.18 U2.25 U3.1 Y1.2 Y1.4 | length 1191.7
  L1 (Signal) w10: 3726.25,2989.85 3726.79,2990.39 3746.06,2990.39 U1.8 ; 3791,3173 3791.34,3172.66 3791.34,3153.94 U1.47 ; v1(3828.83,3272) R1.1 ; U1.23@3968.66,2875.39 3968.66,2860.47 3973.57,2855.57 ; U1.35 4013.94,3108.66 4036.66,3108.66 4041,3113 4046,3113
  L1 (Signal) w11: C12.2@3420,3275.94 3424.3,3280.24 3440.28,3280.24 3452.17,3292.13 U2.11 ; C13.2@3420,3334.28 3422.79,3331.5 U2.9
  L1 (Signal) w12: 3791,3173 3791,3184 ; 3973.57,2855.57 3975,2854.13 3975,2850
  L1 (Signal) w14: v1(3398,3275) v1(3398,3275) 3419.95,3275.05 C12.2 ; v1(3398,3336) 3398.06,3336.06 3419.94,3336.06 C13.2 ; v1(3515,2960) C9.2 ; v1(3515.39,2884.61) Y1.4 ; C11.2 3547.4,3181.65 3560.64,3194.89 v1(3560.64,3196.42) ; v2(3583.31,3300) 3583.31,3298.03 3610.76,3270.58 3610.76,3243.02 U2.18 ; U2.1 3610.87,3409.03 3620.69,3418.85 3626.85,3418.85 v1(3628,3420) ; Y1.2 v1(3644.61,2835.39) ; C10.2 3627.12,2959.86 3628.92,2959.86 3639.78,2949 3667.38,2949 3673.38,2955 v1(3675,2955) 3701.76,2981.76 3707.7,2981.76 3712.3,2986.36 3712.3,2988.05 3724.45,2988.05 3726.25,2989.85 ; v1(3673.15,3215) 3674.3,3216.15 3674.3,3218.12 3698.03,3241.85 C14.2 ; v1(3790.9,3223.9) C5.2 3791,3203.9 3791,3184 ; v1(3880,2796) C7.2 ; v1(3898.03,2481.97) J3.6 ; 3975,2850 3975,2830.1 C3.2 v1(3975.1,2806.9) ; 4046,3113 4059.9,3113 4060.86,3113.95 4061.7,3113.95 4064,3116.25 C4.2 v1(4094.1,3117.1) ; v1(4056.18,3470.18) 4057.8,3470.18 4060.68,3467.3 4072.8,3467.3 C8.2 ; v1(4070,2880) R5.1 ; J2.5 v1(4120,3412) ; v1(4468.39,3176.18) J1.5 v1(4547.82,3176.18) ; R4.2 v1(4600,2832.33)
  L1 (Signal) w16: v1(3588.52,3087.52) C6.2 3628.86,3087.52 3641.53,3100.19 C1.2
  other v1: 4380,2610 4402,2610 4291.65,2635.35 4265,2745 4265,2765 4308.62,2774.38 4388.62,2774.62
  other v2: 3793.39,2933.39 3836.69,2933.39 3880,2933.39 3923.31,2933.39 3966.61,2933.39 3793.39,2976.69 3836.69,2976.69 3880,2976.69 3923.31,2976.69 3966.61,2976.69 3793.39,3020 3836.69,3020 3880,3020 3923.31,3020 3966.61,3020 3793.39,3063.31 3836.69,3063.31 3880,3063.31 3923.31,3063.31 3966.61,3063.31 3793.39,3106.61 3836.69,3106.61 3880,3106.61 3923.31,3106.61 3966.61,3106.61 3540,3300 3540,3343.31 3583.31,3343.31
IMU_CPOUT: C14.1 U2.20 | length 61.8
  L1 (Signal) w10: C14.1@3697.13,3292.13 C14.1
  L1 (Signal) w14: U2.20 C14.1@3697.13,3292.13
IMU_INT: U1.45 U2.12 | length 627
  L1 (Signal) w10: U2.12 3475.94,3272.44 3474.06,3270.55 3474.06,3163.42 3507.47,3130 3558.28,3130 3620.28,3192 3701,3192 3758,3249 3821,3249 3830.79,3239.21 U1.45
IMU_REGOUT: C12.1 U2.10 | length 67.3
  L1 (Signal) w12: C12.1 3420,3305.75 3424.3,3310.05 3440.22,3310.05 3441.98,3311.81 U2.10
IMU_SCL: R6.2 U1.42 U2.23 | length 505.9
  L1 (Signal) w10: U2.23 3770.22,3351.18 3791.4,3330 v6(3795,3330) ; U1.42 3889.84,3164.53 3910,3184.69 3910,3295.7 3905.7,3300 3903.47,3300 3899.17,3304.3 3899.17,3356.77 3895,3360.94 v6(3895,3365)
  L4 (Signal) w10: v6(3795,3330) 3830,3365 v6(3895,3365)
IMU_SDA: R7.2 U1.43 U2.24 | length 423.3
  L1 (Signal) w10: R7.2@3865.86,3300 3870.16,3295.7 U1.43
  L1 (Signal) w12: U2.24 3829.13,3370.87 3864.81,3335.19 R7.2
LED_PWR_K: DS1.2 R4.1 | length 90
  L1 (Signal) w14: DS1.2 R4.1
MCU_BOOT0: R1.2 U1.44 | length 75.5
  L1 (Signal) w10: R1.2 3850,3227.36 3850.47,3226.89 U1.44
MCU_LED_A: D1.A U1.26 | length 56.7
  L1 (Signal) w10: U1.26 4013.94,2931.34 4068.66,2931.34 D1.A
MCU_LED_C: D1.K R5.2 | length 51.9
  L1 (Signal) w10: D1.K 4109.37,2888.91 4110,2888.28 4110,2880.08 4110.08,2880 R5.2
MCU_NRST: C8.1 J2.3 R2.1 U1.7 | length 1124.2
  L1 (Signal) w10: v4(3655.61,2981.53) 3655.61,2985.59 3669.48,2999.46 ; 3669.48,2999.48 3680.16,3010.16 3721.87,3010.16 3722.11,3010.39 3735.24,3010.39 U1.7@3735.39,3010.24
  L1 (Signal) w12: v4(4180,3423) R2.1
  L1 (Signal) w14: C8.1 4170,3465 R2.1 ; J2.3 4172.67,3382.67 J2.3@4173.82,3383.82
  L1 (Signal) w20: J2.3@4172.67,3382.67 4172.67,3414.32 4180,3421.65 v4(4180,3423)
  L4 (Signal) w14: v4(3655.61,2981.53) 3655.61,3107.4 3695.98,3147.77 4056.77,3147.77 4180,3271 v4(4180,3423)
MCU_OSC_IN: C9.1 U1.5 Y1.1 | length 407.1
  L1 (Signal) w10: Y1.1 3562.2,2850.08 3574.14,2850.08 3580,2855.94 3580,2917.42 3561.98,2935.44 C9.1 3561.98,3016.98 3594.53,3049.53 U1.5
MCU_OSC_OUT: R3.2 U1.6 | length 130.7
  L1 (Signal) w10: R3.2 3627.39,3006.64 3651.19,3006.64 3674.39,3029.84 U1.6
MCU_PA4: J3.2 U1.14 | length 393.4
  L1 (Signal) w10: J3.2 3701.18,2776.18 3791.42,2866.42 U1.14
MCU_PA5: J3.3 U1.15 | length 381.5
  L1 (Signal) w10: J3.3 3750,2530.51 3750,2775 3811.1,2836.1 U1.15
MCU_PA6: J3.4 U1.16 | length 368.9
  L1 (Signal) w10: J3.4 3800,2530.51 3800,2775 3830.79,2805.79 U1.16
MCU_PA7: J3.5 U1.17 | length 356.7
  L1 (Signal) w10: J3.5 3850.39,2531.69 3850.39,2886.06 U1.17
MCU_SWCLK: J2.4 U1.37 | length 324.6
  L1 (Signal) w10: U1.37 3988.27,3193.27 4010,3215 4135,3215 4170,3250 J2.4
MCU_SWDIO: J2.2 U1.34 | length 386.8
  L1 (Signal) w10: U1.34 4116.9,3088.9 4220,3192 J2.2
MCU_SWO: J2.6 U1.39 | length 308
  L1 (Signal) w10: U1.39 3948.9,3193.9 3995,3240 4099.14,3240 4120,3260.86 J2.6
MCU_VCAP1: C7.1 U1.22 | length 57.9
  L1 (Signal) w10: U1.22 3948.98,2886.06 3948.98,2869.02
  L1 (Signal) w12: 3948.66,2859 3949,2859.34 3949,2869
  L1 (Signal) w14: C7.1 3948.66,2833.7 3948.66,2859
USB_D_N: J1.2 U1.32 | length 518.9
  L1 (Signal) w10.24: U1.32 4024.28,3049.53 4025.01,3050.25 4217.14,3050.25 4269.98,3103.08 4505.38,3103.08 J1.2
USB_D_P: J1.3 U1.33 | length 518.9
  L1 (Signal) w10.24: U1.33 4024.28,3069.21 4025.01,3068.49 4209.59,3068.49 4262.42,3121.33 4505.38,3121.33 J1.3
VBUS: C15.1 FB1.1 J1.1
XTAL_IN: C10.1 R3.1 Y1.3 | length 127.9
  L1 (Signal) w10: R3.1 3594.25,2986.3 3603.02,2977.53 3603.02,2894.07 Y1.3
pads on no net: J1.4 J1.6 J1.7 J1.8 J1.9 J1.10 J1.11 J2.MH J3. U1.2 U1.3 U1.4 U1.10 U1.11 U1.12 U1.13 U1.18 U1.19 U1.20 U1.21 U1.25 U1.27 U1.28 U1.29 U1.30 U1.31 U1.38 U1.40 U1.41 U1.46 U2.2 U2.3 U2.4 U2.5 U2.6 U2.7 U2.14 U2.15 U2.16 U2.17 U2.19 U2.21 U2.22

## Polygon pours and split planes (outlines as drawn)
+3V3 on L1 (Signal) "+3V3_L01_P009" (solid, pour order 9): 4410,2470 4420,2480 4420,2525 4410,2535 4290,2535 4235,2590 4235,2700 4230,2705 4175,2705 4170,2700 4170,2475 4130,2435 4130,2395 4145,2380 4255,2380 4270,2395 4270,2440 4300,2470
GND on L1 (Signal) "GND_L01_P014" (solid, pour order 14): 4420,2555 4420,2620 4400,2640 4330,2640 4325,2645 4325,2740 4340,2755 4420,2755 4425,2760 4425,2810 4420,2815 4295,2815 4265,2785 4215.39,2785 4205,2774.61 4205,2725 4210,2720 4230,2720 4260,2690 4260,2630 4290,2600 4350,2600 4360,2590 4360,2555 4365,2550 4415,2550
+5V on L1 (Signal) "+5V_L01_P008" (solid, pour order 8): 4250,2860 4240,2850 4200,2850 4160,2810 4124,2810 4115,2801 4115,2750 4085,2720 4070,2705 4070,2650 4085,2635 4135,2635 4150,2650 4150,2700 4165,2715 4185,2715 4195,2725 4195,2780 4210,2795 4255,2795 4295,2835 4325,2835 4340,2850 4340,2880 4330,2890 4330,2960 4320,2970 4260,2970 4250,2960
VBUS on L1 (Signal) "VBUS_L01_P000" (solid, pour order 0): 4536.22,3082.68 4481.89,3082.68 4367.68,3082.68 4355,3070 4355,2850 4370,2835 4435,2835 4450,2850 4450,3050 4464.96,3064.96 4536.22,3064.96
GND on L2 (GND) "GND_L02_P010" (solid, pour order 10): 3300,3550 cw(c3350,3550) 3350,3600 4600,3600 cw(c4600,3550) 4650,3550 4650,2400 cw(c4600,2400) 4600,2350 3350,2350 cw(c3350,2400) 3300,2400
GND on L3 (GND) "GND_L03_P011" (solid, pour order 11): 3300,3550 cw(c3350,3550) 3350,3600 4600,3600 cw(c4600,3550) 4650,3550 4650,2400 cw(c4600,2400) 4600,2350 3350,2350 cw(c3350,2400) 3300,2400

## Silkscreen, mask and mechanical layers (free items; w line width, h text height)
Top Overlay:
  text "SWD" at 3998.27,3203.27 h50
  text "USB" at 4500,2885 h50
  text "GPIO" at 3680,2610 h50
Mechanical 1:
  the board outline again, w10

## Text inside footprints (layer, text, board x,y; h text height)
D1: Top 3D Body "+" at 4015.54,2950.02 h19.68